# EAGLE board rx_1280 (EAGLE 9.6.0)
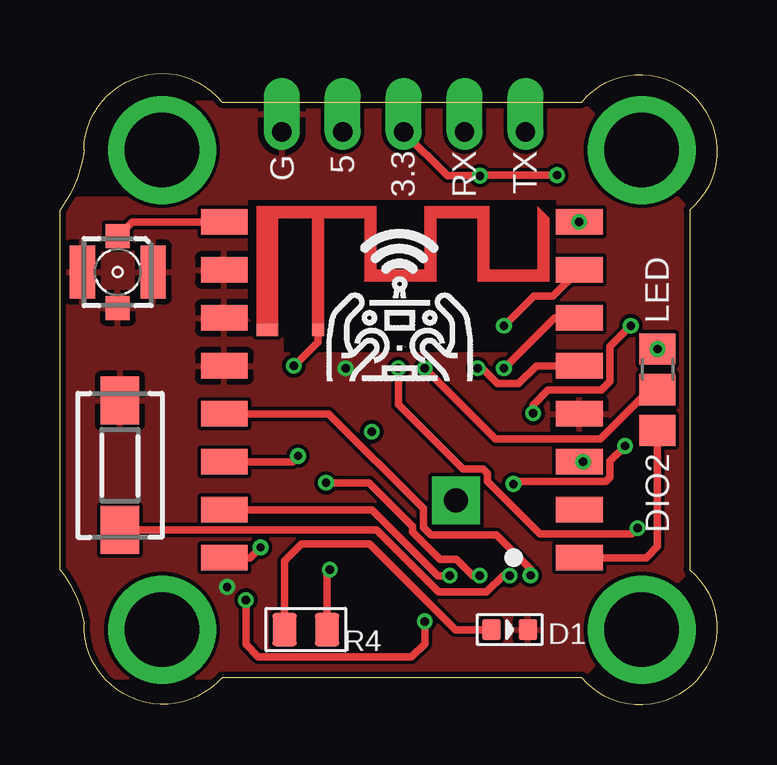
[diagram p0: board, top side]
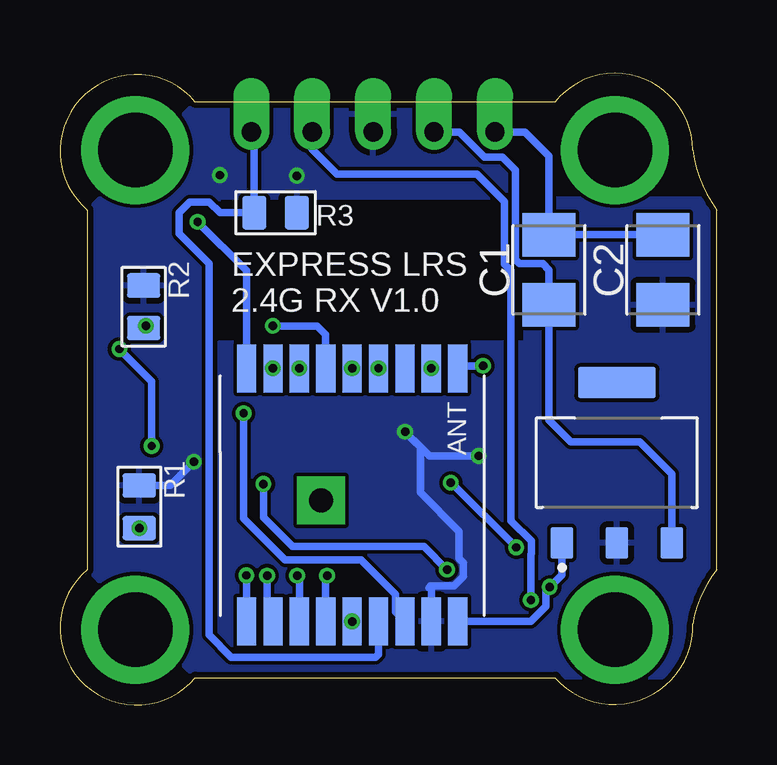
[diagram p1: board, bottom side, seen from below]

Size 27.39 x 26.33 mm. Coordinates in mm from the lower left corner, seen from the top.
Outline: 6.75,25.14 21.75,25.14 arc-190 26.25,20.64 26.25,5.64 arc-190 21.75,1.14 6.75,1.14 arc-140 1,3.39 arc30 0,5.64 0,20.64 arc30 1,23.14 arc-140 6.75,25.14
Copper layers (1*16): Top 0.035mm / dielectric 1.5mm / Bottom 0.035mm
Design rules "SeeedStudio_2layer_DRU_no_angle_20140221": minimum track width 6mil, minimum drill 12mil, track to track 6mil, track to pad 6mil, pad to pad 6mil, via to via 6mil, smd to smd 0mil, copper to edge 10mil, drill to drill 10mil, minimum pad ring 10mil, minimum via ring 6mil, stop-mask expansion 2mil, vias tented up to drill 100mil, thermal gap 10mil

## Footprints (pad centres in the part's own frame; a part is rotated, then mirrored left to right if it is on the bottom)
CAPM3528X210 = smd 1.796 x 2.204: 1 -1.46,0; 2 1.46,0
LED-0603 = smd 0.762 x 0.889: + -0.762,0; - 0.762,0
TRACE_ANTENNA_2.4GHZ_15.2MM = smd 0.5 x 0.5: ANT 0,-0.25 | smd 0.9 x 0.5: GND -2.1,-0.25
A0R-JMP = smd 1.5 x 1.3: 1 0,1.7; 2 0,0; 3 0,-1.7
R0805 = smd 1.397 x 1.016: 1 0,0.889; 2 0,-0.889
DTSM-3 = smd 2 x 1.6: 1 -2.7,0; 2 2.7,0
SX1280 = smd 1.95 x 1.05: 1 -7.4,7; 2 -7.4,5; 3 -7.4,3; 4 -7.4,1; 5 -7.4,-1; 6 -7.4,-3; 7 -7.4,-5; 8 -7.4,-7; 9 7.4,-7; 10 7.4,-5; 11 7.4,-3; 12 7.4,-1; 13 7.4,1; 14 7.4,3; 15 7.4,5; 16 7.4,7
SOT229P700X180-4N = smd 0.93 x 1.31: 1 -2.29,-3.345; 2 0,-3.345; 3 2.29,-3.345 | smd 3.24 x 1.31: 4 0,3.345
ESP-M2 = smd 2 x 0.8: 0 5.25,-8.8; 2 5.25,-9.9; 4 5.25,-7.7; 5 5.25,-6.6; 12 -5.3,-7.7; 13 -5.3,-8.8; 14 -5.3,-6.6; 15 -5.3,-9.9; 16 -5.3,-5.5; ADC -5.3,-3.3; ANT -5.3,-1.1; EN -5.3,-4.4; GND -5.3,-2.2; GND1 5.25,-1.1; RST 5.25,-3.3; RX 5.25,-5.5; TX 5.25,-4.4; VCC 5.25,-2.2 | drill 1 pad 2 square: P$1 0.2,-6.8
PAD1 = drill 0.8 pad 1.5 offset: P$1 0,0
734120110 = smd 1 x 1: 1 0,-1.5; S@1 0,1.5 | smd 1.05 x 2.2: S@2 -1.475,0; S@3 1.475,0

## Placement (x,y rotation side)
C1  10uF  [CAPM3528X210]  7,18.14 90 bottom
C2  100uF  [CAPM3528X210]  2.25,18.14 90 bottom
D1  BLUE-0603  [LED-0603]  18.75,3.14 0 top
E2  ANTENNATRACE-15.2MM  [TRACE_ANTENNA_2.4GHZ_15.2MM]  10.75,15.89 0 top
JMP1  0R-JUMPA  [A0R-JMP]  24.91,13.14 0 top
R1  10K  [R0805]  24.08,8.26 0 bottom
R2  10K  [R0805]  23.9,16.6 0 bottom
R3  330R  [R0805]  18.4,20.52 270 bottom
R4  330R  [R0805]  10.25,3.14 270 top
S1  DTSM-3  [DTSM-3]  2.5,9.99 90 top
U1  SX1280SX1280  [SX1280]  14.25,13.14 180 top
U2  AMS1117-3.3  [SOT229P700X180-4N]  4.17,10.1 0 bottom
U$1  ESP-M2  [ESP-M2]  9.71,8.73 270 bottom
U$2  CONN-1  [PAD1]  16.87,23.89 90 top
U$3  CONN-1  [PAD1]  19.41,23.89 90 top
U$4  CONN-1  [PAD1]  14.33,23.89 90 top
U$5  CONN-1  [PAD1]  11.79,23.89 90 top
U$6  CONN-1  [PAD1]  9.25,23.89 90 top
X1  734120110  [734120110]  2.41,18.05 180 top

## Library data of the parts
C1 C2 = Capacitor; CATEGORY: Capacitor
D1 = OPL_Optoelectronics; MPN: 19-217-BHC-ZL1M2RY-3T
E2 = esp-ant
JMP1 = jump-0r-smd
R1 R2 = OPL_Resistor; MPN: RC0805FR-0710KL
R3 = OPL_Resistor; MPN: RC0805JR-071KL; VALUE: 1K
R4 = OPL_Resistor; MPN: RC0805JR-071KL
S1 = switch-tact
U1 = RFM95
U2 = AMS1117-3.3; AVAILABILITY: Unavailable; DESCRIPTION: Sot223/Pkg 1-Amp 3.3-Volt Low Drop Out Voltage Regulatator; MF: Advanced Monolithic Systems; MP: AMS1117-3.3; PACKAGE: None; PRICE: None
U$1 = ESP-01F; AVAILABILITY: Unavailable; DESCRIPTION: Wifi Module; MF: Doctors of Intelligence & Technology Co., LTD; MP: ESP-M2; PACKAGE: Package Analog Devices; PRICE: None
U$2-U$6 = wv-connector
X1 = u.fl; AVAILABILITY: Unavailable; DESCRIPTION: U.FL _UMCC_ Connector Receptacle, Male Pin 50Ohm Surface Mount Solder; MF: Molex; MP: 734-12-0110; PACKAGE: None; PRICE: None

## Nets
3V3: C2.1 R1.1 R2.1 R3.1 U1.3 U1.14 U2.2 U$1.VCC U$4.P$1
ANT: U1.9 X1.1
BOOT: S1.1 U$1.0
BUSY: U1.15 U$1.5
DIO1: U1.16 U$1.4
DIO2: JMP1.3 U1.1
EN: R1.2 U$1.EN
GND: C1.2 C2.2 D1.- E2.GND S1.2 U1.4 U1.10 U1.11 U1.12 U2.1 U$1.GND U$1.GND1 U$6.P$1 X1.S@1 X1.S@2 X1.S@3
IO16: JMP1.2 U$1.16
LED: JMP1.1 R4.1
MISO: U1.5 U$1.12
MOSI: U1.6 U$1.13
N$1: D1.+ R4.2
NRESET: U1.13 U$1.2
NSS: U1.8 U$1.15
RST: R2.2 U$1.RST
RX: U$1.RX U$2.P$1
SCK: U1.7 U$1.14
TX: R3.2 U$1.TX U$3.P$1
VIN: C1.1 U2.3 U$5.P$1
WIFI: E2.ANT U$1.ANT

## Tracks (layer width: path | path; a pad name or v marks a point on that pad's centre or on a via)
3V3  (via drill 0.35)
  Top 0.305: U$4.P$1 16.16,22.06 v17.51,22.06 17.53,22.09 v20.72,22.09 | v21.81,10.14 U1.3 | U1.14 9.69,10.14 v9.93,10.38
  Bottom 0.305: U$1.VCC 11.91,4.8 12,4.89 11.93,4.96 10.97,4.96 10.57,5.36 10.57,5.92 10.75,6.11 10.75,7.24 12.37,8.86 12.37,10.76 v13,11.39 11.99,10.38 v9.93,10.38 | R1.1 22.8,9.15 v21.81,10.14
  pour Bottom: -0.25,21.14 3.75,25.14 3.75,25.39 4,25.14 21.75,25.14 26.25,20.64 26.25,5.64 21.75,1.14 20.75,1.14 20.75,21.14
  pour Bottom: -0.25,21.14 -0.25,3.39 0,3.14 2,1.14 20.75,1.14 20.75,15.14 8,15.14 8,21.14
ANT
  Top 0.305: X1.1 3,20.14 U1.9
BOOT  (via drill 0.35)
  Top 0.305: S1.1 13.2,7.29 15.79,4.71 17.78,4.71 18.47,5.39 v18.75,5.39
  Bottom 0.305: v18.75,5.39 18.75,3.72 U$1.0
BUSY  (via drill 0.35)
  Top 0.305: v16.25,5.39 15.75,5.39 13,8.14 U1.15
  Bottom 0.305: v16.25,5.39 16.31,5.33 U$1.5
DIO1  (via drill 0.35)
  Top 0.305: v17.5,5.39 17.22,5.39 16.53,6.07 15.83,6.07 14.7,7.2 14.7,7.44 12.88,9.26 v11.09,9.26 | U1.16 7.94,6.14 v8.37,6.57
  Bottom 0.305: U$1.4 17.41,5.3 v17.5,5.39 | v8.37,6.57 11.06,9.26 v11.09,9.26
DIO2
  Top 0.305: JMP1.3 24.91,6.61 24.45,6.14 U1.1
EN  (via drill 0.35)
  Top 0.305: U$1.EN 14.11,12.53 16.8,9.83 17.64,9.83 17.81,9.66 17.81,9.32 20,7.14 23.85,7.14 R1.2
  other vias: 24.08,7.37 14.11,14.03
GND  (via drill 0.35)
  Bottom 0.305: C2.2 C1.2 7,22.89 8,23.89 U$6.P$1 | U2.1 6.46,5.43 v6.97,4.92 7.12,4.76 7.12,4.11 7.75,3.48 U$1.GND1
  other vias: 11.91,14.03
  pour Top: -0.25,21.14 20.75,21.14 20.75,1.14 21.75,1.14 26.25,5.64 26.25,20.64 21.75,25.14 6.75,25.14 3.75,25.14
  pour Top: 7.75,21.14 7.75,16.14 8,15.89 9.25,15.89 9.25,14.64 20.75,14.64 20.75,1.14 2,1.14 0,3.14 0,20.64 0.5,21.14
IO16  (via drill 0.35)
  Top 0.305: JMP1.2 24.58,13.14 22.52,11.08 18.16,11.08 U$1.16
  other vias: 15.21,14.03
LED  (via drill 0.35)
  Top 0.305: R4.1 11.14,5.53 v11.25,5.64 | v23.57,10.8 22.93,10.16 22.93,9.49 22.75,9.31 19.01,9.31 v18.91,9.21
  Bottom 0.305: JMP1.1 23.57,13.49 v23.57,10.8 | v11.25,5.64 12.22,6.61 17.7,6.61 18.91,7.81 v18.91,9.21
  other vias: 24.91,14.84
MISO  (via drill 0.35)
  Top 0.305: U$1.12 17.62,14.03 18.25,13.4 19.12,13.4 19.86,14.14 U1.5
  other vias: 17.41,14.03
MOSI  (via drill 0.35)
  Top 0.305: U$1.13 20.62,16.14 U1.6
  other vias: 18.51,14.03
N$1
  Top 0.305: R4.2 9.36,6 10.08,6.72 12.91,6.72 16.49,3.14 D1.+
N$2  (via drill 3.1 pad 4.5)
  other vias: 4.25,3.14
N$3  (via drill 3.1 pad 4.5)
  other vias: 4.25,23.14
N$4  (via drill 3.1 pad 4.5)
  other vias: 24.25,3.14
N$5  (via drill 3.1 pad 4.5)
  other vias: 24.25,23.14
NRESET  (via drill 0.35)
  Top 0.305: U1.13 11.2,12.14 15.16,8.18 15.16,7.39 15.46,7.09 18.2,7.09 19.62,5.67 v19.62,5.4
  Bottom 0.305: v19.62,5.4 U$1.2
NSS  (via drill 0.35)
  Bottom 0.305: U$1.15 19.61,18.1 U1.8
  other vias: 21.65,20.14
RST  (via drill 0.35)
  Top 0.305: v23.8,15.81 22.93,14.93 22.93,13.49 22.56,13.12 20.34,13.12 19.73,12.51 v19.73,12.16
  Bottom 0.305: U$1.RST 13.4,3.87 13.4,4.61 14.85,6.05 18.01,6.05 19.74,7.77 19.73,7.78 v19.73,12.16 | R2.2 v23.8,15.81
RX  (via drill 0.35)
  Top 0.305: v7.75,4.37 7.75,2.52 8.26,2.01 14.66,2.01 15.21,2.56 U$1.RX
  Bottom 0.305: v7.75,4.37 7.75,6.28 7.73,6.31 7.73,6.83 8.58,7.68 8.58,18.1 8.86,18.39 8.86,20.99 10,22.13 15.83,22.13 16.87,23.16 U$2.P$1
  other vias: 15.21,3.48
SCK  (via drill 0.35)
  Top 0.305: v18.51,15.8 19.76,17.05 20.56,17.05 U1.7
  Bottom 0.305: U$1.14 16.31,15.44 16.67,15.8 v18.51,15.8
TX
  Bottom 0.305: U$3.P$1 19.29,23.77 R3.2 20.72,20.52 21.17,20.97 21.98,20.97 22.42,20.53 22.42,19.65 21.18,18.4 21.18,2.91 20.25,1.98 14.23,1.98 14.11,2.11 U$1.TX
VIN
  Bottom 0.305: U$5.P$1 10.74,23.89 9.69,22.83 8.95,22.83 8.41,22.3 8.41,18.58 8.23,18.4 7.26,18.4 7,18.14 C1.1 7,11.87 6.09,10.96 3.21,10.96 1.88,9.63 U2.3
WIFI  (via drill 0.35)
  Top 0.305: E2.ANT 10.75,15.14 v9.75,14.14
  Bottom 0.305: v9.75,14.14 10.7,14.14 U$1.ANT

## Text on the board
tNames: G | 5 | 3.3 | RX | TX | LED | DIO2
bNames: EXPRESS LRS / 2.4G RX V1.0 | ANT